# Altium PCB LP_LED_CUBE_8x8x8.PcbDoc (part 2 of 2)
Units mil, origin at the board's own origin, x right, y up, seen from the top; angles counter-clockwise.
Board outline 5225 x 2860 mil, 2 copper layers (Top Layer, Bottom Layer), stack 42.17 mil thick; 161 components, 194 nets, 901 pads, 1 vias.
Unrouted connection lines stored in the file: 1.
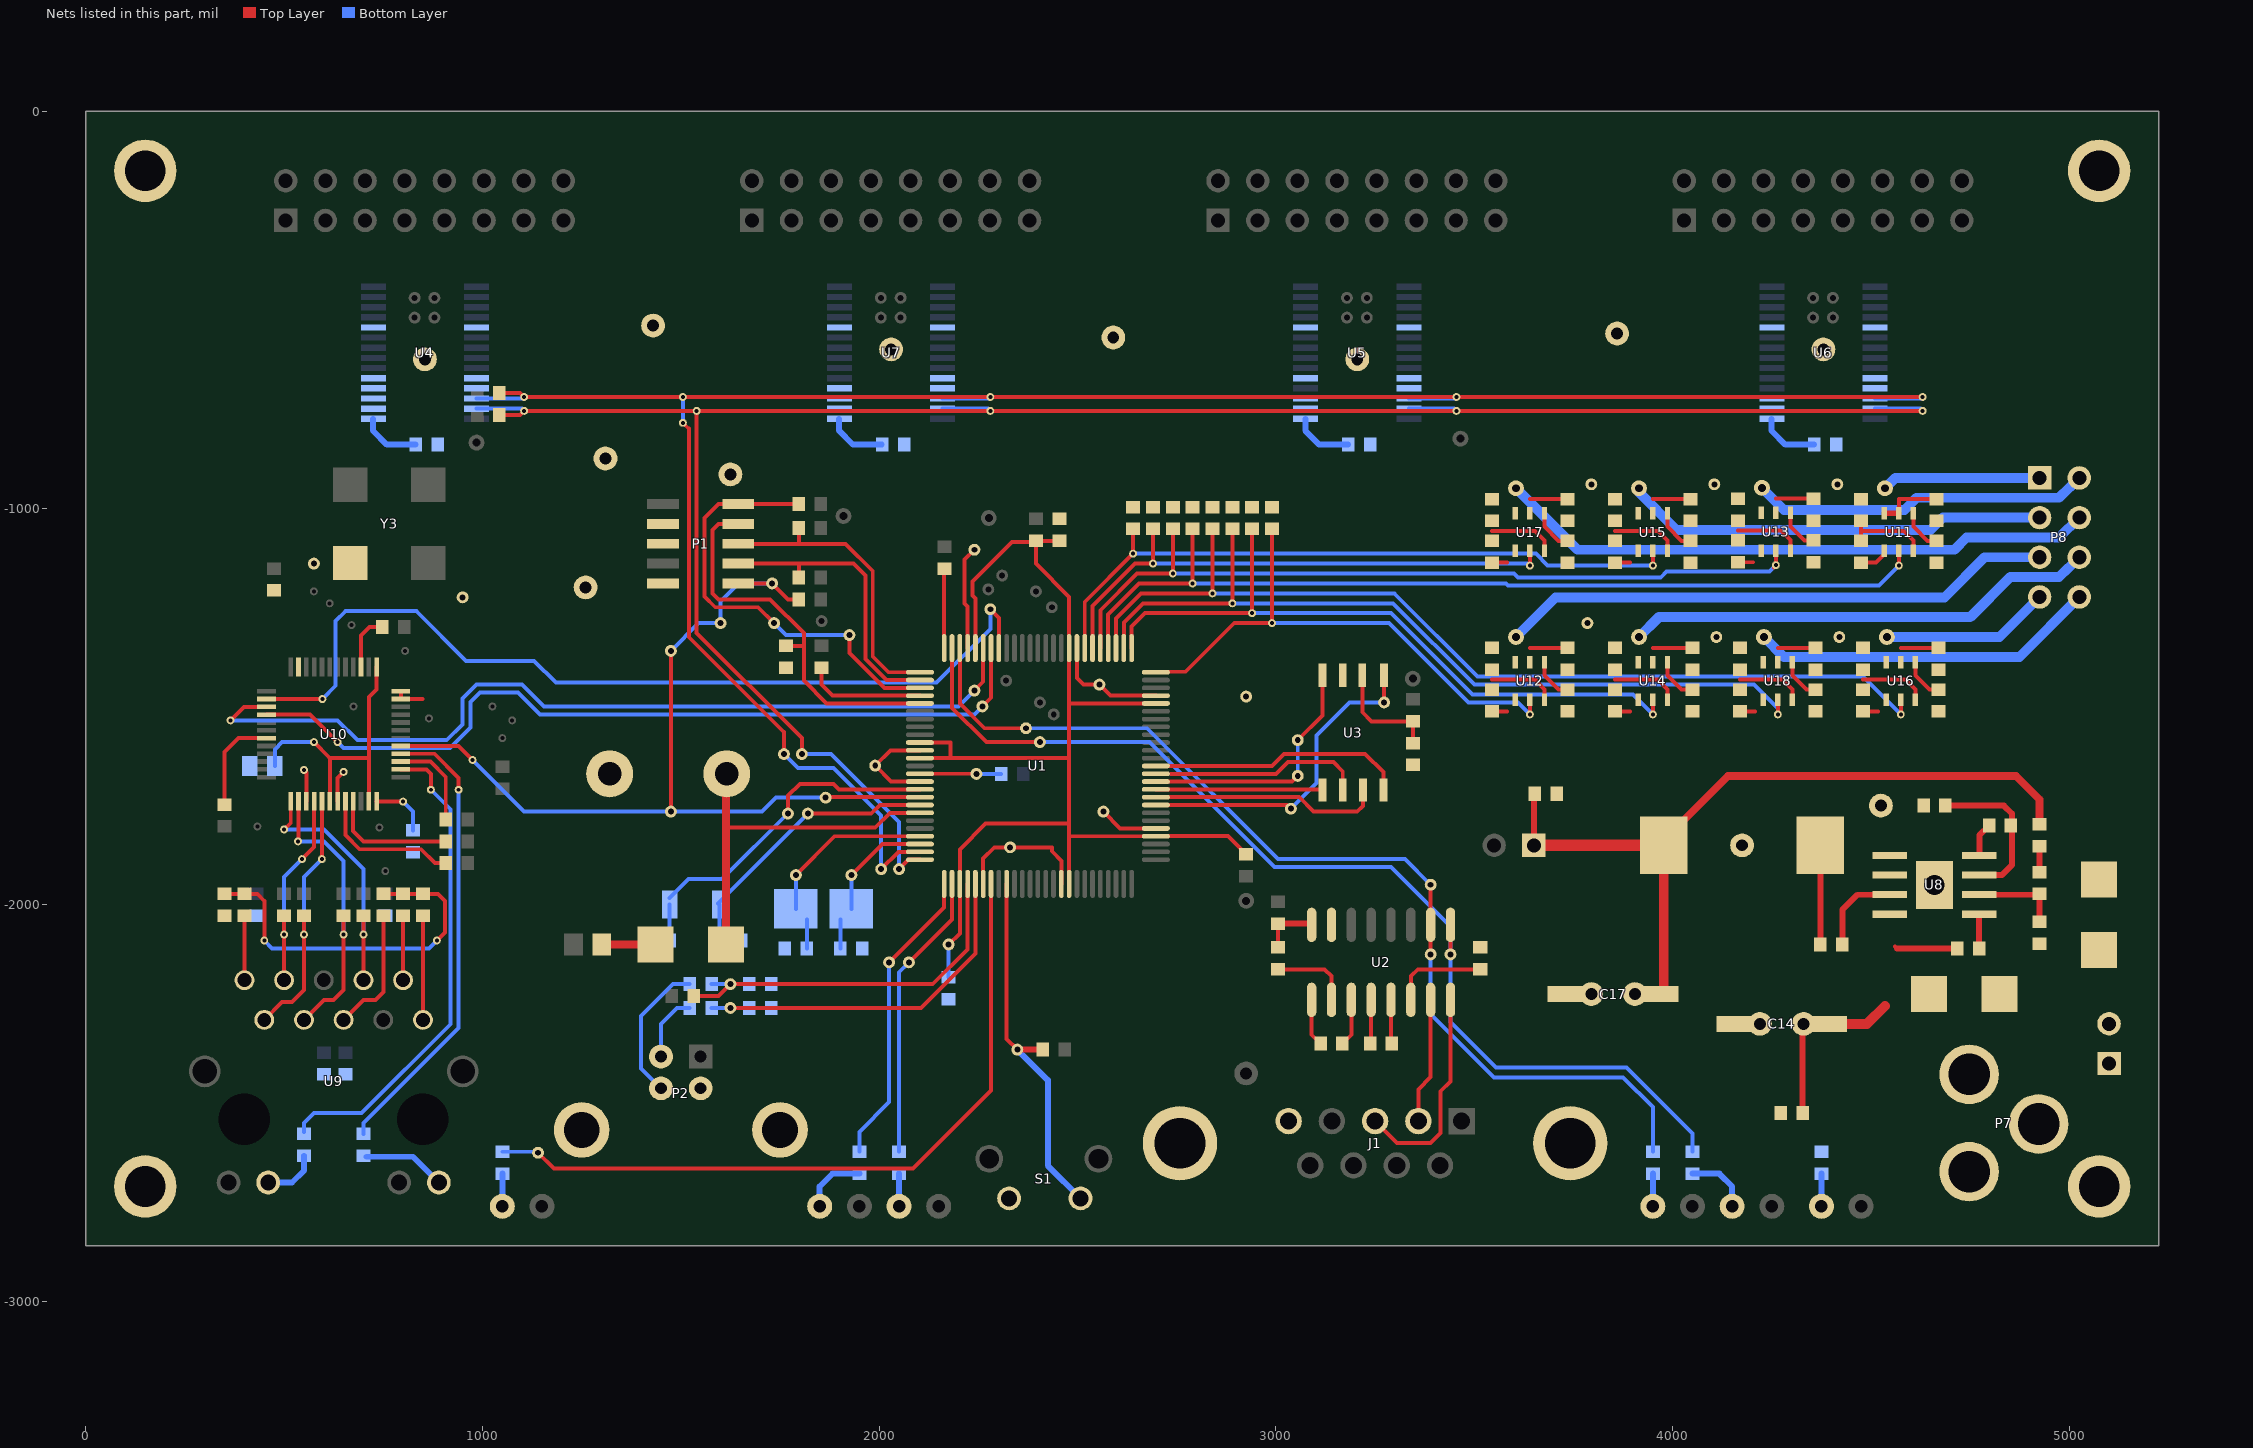
[diagram p2: the nets of this part, all layers, seen from the top]

## Via types
v1: diameter 50, hole 28, Top Layer to Bottom Layer, 1 vias

## Nets (pads, with @x,y where several pads share a name; then routed paths per layer and width w, separated by ;. In a path a pad name is that pad's centre, name@x,y a point inside that pad or via, vN(x,y) a via of type N, cw(c..) or ccw(c..) an arc to the next point about the centre after c; other vN are vias at no path point) (continued)
E-TX-EN: pad.58 pad.61 U1.93 U10.2 | length 2298.6
  Top Layer w10: U10.2@455.71,-1481.42 pad.58@596.42,-1481.42 ; pad.61@2280,-1255 2301.57,-1276.57 U1.93@2301.57,-1352.76
  Bottom Layer w10: pad.58@596.42,-1481.42 630,-1447.83 630,-1285 655,-1260 833.43,-1260 958.43,-1385 1130,-1385 1185,-1440 2145,-1440 2280,-1305 pad.61@2280,-1255
E-TXD0: pad.52 pad.53 U1.95 U10.3 | length 2252.3
  Top Layer w10: pad.52@365,-1535 398.9,-1501.1 U10.3@455.71,-1501.1 ; pad.53@2240,-1460 2262.2,-1437.8 U1.95@2262.2,-1352.76
  Bottom Layer w10: pad.52@365,-1535 635,-1535 685,-1585 910,-1585 950,-1545 950,-1480 985,-1445 1100,-1445 1155,-1500 2200,-1500 pad.53@2240,-1460
E-TXD1: pad.50 pad.51 U1.94 U10.4 | length 2122.6
  Top Layer w10: U10.4@455.71,-1520.79 565.79,-1520.79 pad.51@635,-1590 ; pad.50@2260,-1500 2281.89,-1478.11 U1.94@2281.89,-1352.76
  Bottom Layer w10: pad.51@635,-1590 650,-1605 918.28,-1605 970,-1553.28 970,-1488.28 993.28,-1465 1090,-1465 1145,-1520 2240,-1520 pad.50@2260,-1500
F-CS: U1.63 U3.4 | length 649.8
  Top Layer w10: U1.63@2697.24,-1650 2990,-1650 3020,-1620 3225,-1620 3270.79,-1665.79 U3.4@3270.79,-1710.67
F-RES: U1.59 U3.3 | length 583.2
  Top Layer w10: U1.59@2697.24,-1728.74 3058.74,-1728.74 3095,-1765 3205,-1765 3219.61,-1750.39 U3.3@3219.61,-1710.67
F-SCK: U1.62 U3.2 | length 502.8
  Top Layer w10: 2735,-1670 3000,-1670 3030,-1640 3145,-1640 3168.43,-1663.43 U3.2@3168.43,-1710.67
F-SI: U1.60 U3.1 | length 420
  Top Layer w10: U1.60@2697.24,-1709.06 U3.1@3117.24,-1709.06
F-SO: pad.79 pad.80 U1.61 U3.8 | length 643.2
  Top Layer w10: U1.61@2697.24,-1689.37 3040.63,-1689.37 pad.79@3055,-1675 ; pad.80@3055,-1585 3117.24,-1522.76 U3.8@3117.24,-1421.3
  Bottom Layer w10: pad.79@3055,-1675 pad.80@3055,-1585
F-WP: pad.5@3272.76,-1490 pad.82 U1.58 U3.5 | length 829.3
  Top Layer w10: U1.58@2697.24,-1748.43 3028.43,-1748.43 pad.82@3037.76,-1757.76 ; pad.5@3272.76,-1490 U3.5@3272.76,-1421.3
  Bottom Layer w10: pad.82@3037.76,-1757.76 3102.76,-1692.76 3102.76,-1572.76 3185.51,-1490 pad.5@3272.76,-1490
GND: BT1.2 C4.1 C5.1 C6.1 C7.1 C8.1 C9.2 C10.1 C11.1 C12.2 C13.2 C14.2 C15.2 C17.2 C18.2 C19.2 C20.1 C21.1 C22.1 C23.1 C24.1 C25.2 C26.2 C27.2 C29.2 C31.2 C33.2 C35.2 C37.2 C39.2 C41.2 J1.5 J1.10 J1.11 P1.3 P1.5 P1.9 P2.4 P2.5 P7.2 P7.3 pad. pad.0@575,-1140 pad.1@950,-1225 pad.2@550,-1660 pad.5@2925,-1475 pad.6 pad.7 pad.10@2240,-1105 pad.11@2030,-600 pad.11@3205,-625 pad.11@4380,-600 pad.12@855,-625 pad.16@4660,-1950 pad.19@3785,-1290 pad.19@3795,-940 pad.19@4105,-940 pad.19@4110,-1325 pad.19@4415,-940 pad.19@4420,-1325 pad.23@4175,-1850 pad.23@4525,-1750 pad.27@2330,-1855 pad.28@1310,-875 pad.29@1625,-915 pad.30 pad.31@2590,-570 pad.32@1430,-540 pad.33@3860,-560 pad.41 R7.2 R21.2 R22.1 R23.1 R24.2 R28.1 R30.1 R47.2 R50.2 R51.2 R52.1 R53.1 R56.2 R57.2 R58.1 R59.1 R62.2 R63.2 R64.1 R65.1 R68.2 R69.2 R70.1 R71.1 S1.1 U1.11 U1.15 U1.31 U1.41 U1.55 U1.72 U1.83 U1.97 U2.15 U3.7 U4.2 U4.3 U4.4 U4.5 U4.10 U4.19 U4.24 U4.25 U5.2 U5.3 U5.5 U5.10 U5.19 U5.24 U5.25 U6.2 U6.3 U6.10 U6.19 U6.24 U6.25 U7.2 U7.3 U7.4 U7.10 U7.19 U7.24 U7.25 U8.5 U10.15 U10.19 U10.35 U10.36 U10.47 Y3.2 | length 1549.5
  Top Layer w10: pad.2@550,-1660 556.1,-1666.1 U10.15@556.1,-1739.29 ; U10.19@634.84,-1739.29 634.84,-1680.16 pad.30@650,-1665 ; U10.35@794.29,-1481.42 U10.36@794.29,-1461.73 ; U10.35@794.29,-1481.32 848.58,-1481.42 ; U1.15@2102.76,-1689.37 2030.29,-1689.37 pad.7@1990,-1649.08 2028.45,-1610.63 U1.11@2102.76,-1610.63 ; U1.97@2222.83,-1352.76 2222.83,-1247.83 2215,-1240 2215,-1130 pad.10@2240,-1105 ; U1.31@2262.2,-1947.24 2262.2,-1882.8 2290,-1855 pad.27@2330,-1855 2435,-1855 2435,-1865 2459.06,-1889.06 U1.41@2459.06,-1947.24 ; U1.83@2498.43,-1352.76 2498.43,-1428.43 2515,-1445 pad.41@2555,-1445 2582.83,-1472.83 U1.72@2697.24,-1472.83 ; pad.6@2565,-1765 2607.48,-1807.48 U1.55@2697.24,-1807.48
LED1: pad.29@2075,-2145 R13.1 U1.27 | length 730.5
  Top Layer w10: pad.29@2075,-2145 2183.46,-2036.54 U1.27@2183.46,-1947.24
  Bottom Layer w10: R13.1@2050,-2622.44 2050,-2170 pad.29@2075,-2145
LED2: pad.28@2025,-2145 R14.1 U1.26 | length 763.7
  Top Layer w10: pad.28@2025,-2145 2163.78,-2006.22 U1.26@2163.78,-1947.24
  Bottom Layer w10: R14.1@1950,-2622.44 1950,-2572.44 2025,-2497.44 pad.28@2025,-2145
LED_ACT: pad.25@870,-1710 R37.2 U10.26 | length 1227.1
  Top Layer w10: U10.26@794.29,-1658.58 858.58,-1658.58 870,-1670 pad.25@870,-1710
  Bottom Layer w10: R37.2@550,-2572.44 550,-2550 575,-2525 695,-2525 920,-2300 920,-1760 pad.25@870,-1710
LED_LINK: pad.26@940,-1710 R38.2 U10.28 | length 1167.7
  Top Layer w10: U10.28@794.29,-1619.21 879.21,-1619.21 940,-1680 pad.26@940,-1710
  Bottom Layer w10: R38.2@700,-2577.44 700,-2550 940,-2310 pad.26@940,-1710
"M232 +V": C2.1 U2.2 | length 201.7
  Top Layer w10: C2.1@3005,-2162.56 3122.56,-2162.56 3140,-2180 U2.2@3140,-2239.49
"M232 RX2": J1.3 U2.8 | length 544
  Top Layer w10: J1.3@3250,-2545.08 3304.92,-2600 3390,-2600 3415,-2575 3415,-2470 3440,-2445 U2.8@3440,-2239.49
"M232 TX2": J1.2 U2.7 | length 318.4
  Top Layer w10: J1.2@3359.06,-2545.08 3359.06,-2465 3390,-2434.06 U2.7@3390,-2239.49
NetBT1_1: BT1.1 D6.2 U1.19 | length 934.5
  Top Layer w10: 1613.58,-1805 1990,-1805 2026.89,-1768.11 U1.19@2102.76,-1768.11
  Top Layer w20: D6.2@1613.58,-2100 1613.58,-1805 BT1.1@1613.58,-1670
NetC1_1: C1.1 U2.3 | length 119.8
  Top Layer w10: C1.1@3167.56,-2350 3190,-2327.56 U2.3@3190,-2239.49
NetC1_2: C1.2 U2.1 | length 119.8
  Top Layer w10: U2.1@3090,-2239.49 3090,-2327.56 C1.2@3112.44,-2350
NetC2_2: C2.2 L1.1 U2.16 | length 144.9
  Top Layer w10: C2.2@3005,-2107.44 L1.1@3005,-2047.56
  Top Layer w15: L1.1@3005,-2047.56 U2.16@3090,-2047.56
NetC3_1: C3.1 U2.5 | length 108
  Top Layer w10: C3.1@3290,-2347.44 U2.5@3290,-2239.49
NetC3_2: C3.2 U2.4 | length 108
  Top Layer w10: C3.2@3240,-2347.44 U2.4@3240,-2239.49
NetC4_2: C4.2 U2.6 | length 241.7
  Top Layer w10: U2.6@3340,-2239.49 3340,-2180 3357.44,-2162.56 C4.2@3515,-2162.56
NetC5_2: C5.2 pad.88 U1.16 Y1.1 | length 872.5
  Top Layer w10: pad.88@1770,-1770 1770,-1725 1800,-1695 1885,-1695 1899.06,-1709.05 U1.16@2102.76,-1709.06
  Bottom Layer w10: Y1.1@1471.46,-1982.44 1518.9,-1935 1603.9,-1935 pad.88@1769.45,-1769.45 ; C5.2@1472.01,-2089.45 Y1.1@1472.01,-1999.21
NetC6_2: C6.2 pad.89 U1.18 Y1.2 | length 702.9
  Top Layer w10: pad.89@1820,-1770 1980,-1770 2001.57,-1748.43 U1.18@2102.76,-1748.43
  Bottom Layer w10: Y1.2@1593.6,-1996.4 pad.89@1820.55,-1769.45 ; C6.2@1597.99,-2089.45 Y1.2@1597.99,-1999.21
NetC7_2: C7.2 pad.84@1790,-1925 U1.22 Y2.1 | length 510.7
  Top Layer w10: pad.84@1790,-1925 1887.83,-1827.17 U1.22@2102.76,-1827.17
  Bottom Layer w10: Y2.1@1790,-2010 pad.84@1790,-1925 ; C7.2@1817.56,-2110 Y2.1@1817.56,-2037.56
NetC8_2: C8.2 pad.84@1930,-1925 U1.23 Y2.2 | length 362.6
  Top Layer w10: pad.84@1930,-1925 2008.15,-1846.85 U1.23@2102.76,-1846.85
  Bottom Layer w10: C8.2@1902.44,-2110 Y2.2@1902.44,-2037.56 ; Y2.2@1930,-2010 pad.84@1930,-1925
NetC9_1: C9.1 C10.2 L2.2 L3.2 pad.73 U1.10 U1.12 U1.28 U1.42 U1.54 U1.71 U1.84 U1.96 | length 3146.5
  Top Layer w10: U1.12@2102.76,-1630.32 2180,-1630.32 ; U1.10@2102.76,-1590.94 2180,-1590.94 2180,-1630.32 ; pad.73@2175,-2100 2203.15,-2071.85 2203.15,-1860.22 2268.37,-1795 2478.74,-1795 ; U1.96@2242.52,-1352.76 2242.52,-1227.52 2235,-1220 2235,-1185 2335,-1085 L3.2@2395,-1085 ; L3.2@2395,-1082.56 C10.2@2455,-1082.56 ; L3.2@2395,-1080 L3.2@2395,-1085 ; 2478.43,-1630.32 2180,-1630.32 ; U1.42@2478.74,-1947.24 2478.74,-1492.52 ; 2478.74,-1827.17 U1.54@2697.24,-1827.17 ; U1.54@2697.24,-1826.56 2879.72,-1826.56 L2.2@2925,-1871.83 ; U1.71@2697.24,-1492.52 2478.74,-1492.52 ; L3.2@2395,-1085 2395,-1140 2478.74,-1223.74 U1.84@2478.74,-1352.76 2478.74,-1492.52
  Bottom Layer w10: C9.1@2175,-2182.44 pad.73@2175,-2100
NetC11_2: C11.2 L4.1 U3.6 | length 269.9
  Top Layer w10: U3.6@3217.64,-1421.3 3217.64,-1514.27 3240.93,-1537.56 L4.1@3345,-1537.56 C11.2@3345,-1577.44
NetC16_1: C16.1 U8.7 | length 222.5
  Top Layer w15: C16.1@4427.56,-2100 4427.56,-2012.44 4465.39,-1974.61 U8.7@4546.81,-1974.61
NetC16_2: C16.2 L5.1 U8.6 | length 249.9
  Top Layer w15: C16.2@4372.44,-2100 L5.1@4372.44,-1850.06
NetC19_1: C19.1 R29.2 U8.3 | length 398.1
  Top Layer w15: C19.1@4687.56,-1750 4835,-1750 4855,-1770 4855,-1900 4829.61,-1925.39 U8.3@4773.19,-1925.39
NetC25_1: C25.1 pad.27@885,-2090 pad.28@450,-2090 R31.2 R36.2 R39.1 R40.1 | length 929.4
  Top Layer w10: C25.1@350,-1972.44 R40.1@400,-1972.44 432.44,-1972.44 450,-1990 pad.28@450,-2090 ; R36.2@750,-1972.44 R31.2@800,-1972.44 R39.1@850,-1972.44 887.44,-1972.44 905,-1990 905,-2070 pad.27@885,-2090
  Bottom Layer w10: pad.28@450,-2090 470,-2110 865,-2110 pad.27@885,-2090
NetC28_2: C28.2 R48.1 U11.6 | length 218
  Top Layer w10: R48.1@4475,-1082.44 4475,-1057.5 ; C28.2@4475,-1032.56 4475,-1057.5 ; U11.6@4607,-1108 4607,-1082 4582.5,-1057.5 4475,-1057.5
NetC30_2: C30.2 R49.1 U12.6 | length 168.1
  Top Layer w10: 3545,-1432.5 3652.5,-1432.5 3677,-1457 U12.6@3677,-1483
NetC32_2: C32.2 R54.1 U13.6 | length 168.1
  Top Layer w10: 4165,-1056.5 4272.5,-1056.5 4297,-1081 U13.6@4297,-1107
NetC34_2: C34.2 R55.1 U14.6 | length 168.1
  Top Layer w10: 3855,-1432.5 3962.5,-1432.5 3987,-1457 U14.6@3987,-1483
NetC36_2: C36.2 R60.1 U15.6 | length 168.1
  Top Layer w10: 3855,-1057.5 3962.5,-1057.5 3987,-1082 U15.6@3987,-1108
NetC38_2: C38.2 R61.1 U16.6 | length 168.1
  Top Layer w10: 4480,-1432.5 4587.5,-1432.5 4612,-1457 U16.6@4612,-1483
NetC40_2: C40.2 R66.1 U17.6 | length 168.1
  Top Layer w10: 3545,-1057.5 3652.5,-1057.5 3677,-1082 U17.6@3677,-1108
NetC42_2: C42.2 R67.1 U18.6 | length 168.1
  Top Layer w10: 4170,-1432.5 4277.5,-1432.5 4302,-1457 U18.6@4302,-1483
NetD1_2: D1.2 R12.2 | length 82.4
  Bottom Layer w15: D1.2@1050,-2760 R12.2@1050,-2677.56
NetD2_2: D2.2 R13.2 | length 82.4
  Bottom Layer w15: D2.2@2050,-2760 R13.2@2050,-2677.56
NetD3_2: D3.2 R14.2 | length 163.4
  Bottom Layer w15: D3.2@1850,-2760 1850,-2710 1882.44,-2677.56 R14.2@1950,-2677.56
NetD4_2: D4.2 R15.2 | length 82.4
  Bottom Layer w15: D4.2@3950,-2760 R15.2@3950,-2677.56
NetD5_2: D5.2 R16.2 | length 163.4
  Bottom Layer w15: R16.2@4050,-2677.56 4117.56,-2677.56 4150,-2710 D5.2@4150,-2760
NetD6_1: D6.1 R17.1 | length 136
  Top Layer w20: R17.1@1300.87,-2100 D6.1@1436.85,-2100
NetD7_1: D7.1 D8.1 W1.2
NetD9_2: D9.2 R30.2 | length 82.4
  Bottom Layer w15: D9.2@4375,-2760 R30.2@4375,-2677.56
NetP2_2: P2.2 R20.2 | length 171.5
  Bottom Layer w10: P2.2@1450,-2382.5 1450,-2300 1490,-2260 R20.2@1522.44,-2260
NetP2_3: P2.3 R19.2 | length 358.8
  Bottom Layer w10: P2.3@1450,-2462.5 1400,-2412.5 1400,-2280 1480,-2200 R19.2@1522.44,-2200
NetP7_1: P7.1 W1.1
NetR11_2: pad.70 R11.2 S1.2 U1.34 | length 934.2
  Top Layer w10: U1.34@2321.26,-1947.24 2321.26,-2338.13 pad.70@2348.13,-2365
  Top Layer w15: pad.70@2348.13,-2365 R11.2@2412.44,-2365
  Bottom Layer w15: pad.70@2348.13,-2365 2425,-2441.87 2425,-2657.5 S1.2@2507.5,-2740
NetR21_1: R21.1 U4.1 | length 151.9
  Bottom Layer w15: U4.1@724,-775 724,-805 759,-840 R21.1@831.44,-840
NetR22_2: R22.2 U5.1 | length 151.9
  Bottom Layer w15: U5.1@3074,-775 3074,-805 3109,-840 R22.2@3181.44,-840
NetR23_2: R23.2 U6.1 | length 151.9
  Bottom Layer w15: U6.1@4249,-775 4249,-805 4284,-840 R23.2@4356.44,-840
NetR24_1: R24.1 U7.1 | length 151.9
  Bottom Layer w15: U7.1@1899,-775 1899,-805 1934,-840 R24.1@2006.44,-840
NetR25_1: R25.1 U8.1 | length 86.4
  Top Layer w10: U8.1@4772.56,-2024.45 U8.1@4773.19,-2023.82
  Top Layer w15: R25.1@4772.56,-2110 U8.1@4772.56,-2024.45
NetR26_1: R26.1 R27.2 | length 64.9
  Top Layer w15: R27.2@4925,-1917.44 R26.1@4925,-1852.56
NetR27_1: R27.1 R28.2 U8.2 | length 222.5
  Top Layer w10: R27.1@4922.95,-1974.61 R27.1@4925,-1972.56
  Top Layer w15: U8.2@4773.19,-1974.61 R27.1@4922.95,-1974.61 ; R28.2@4925,-2042.44 R27.1@4925,-1972.56
NetR29_1: R29.1 U8.4 | length 86.2
  Top Layer w15: U8.4@4773.19,-1876.18 4773.19,-1824.25 R29.1@4797.44,-1800
NetR31_1: R31.1 U9.8 | length 162.4
  Top Layer w10: U9.8@800,-2190 R31.1@800,-2027.56
NetR36_1: R36.1 U9.5 | length 321.4
  Top Layer w10: U9.5@650,-2290 700,-2240 730,-2240 750,-2220 R36.1@750,-2027.56
NetR37_1: R37.1 U9.12 | length 139.9
  Bottom Layer w15: U9.12@460,-2700 520,-2700 550,-2670 R37.1@550,-2632.56
NetR38_1: R38.1 U9.14 | length 209.5
  Bottom Layer w15: R38.1@707.44,-2635 825,-2635 U9.14@890,-2700
NetR39_2: R39.2 U9.10 | length 262.4
  Top Layer w10: U9.10@850,-2290 R39.2@850,-2027.56
NetR40_2: R40.2 U9.9 | length 162.4
  Top Layer w10: U9.9@400,-2190 R40.2@400,-2027.56
NetR41_1: R41.1 U10.7 | length 252.5
  Top Layer w10: R41.1@350.16,-1747.28 350.16,-1614.84 385.16,-1579.84 U10.7@455.71,-1579.84
NetR42_2: R42.2 U10.39 | length 141.9
  Top Layer w10: U10.39@693.9,-1400.71 693.9,-1321.1 715,-1300 R42.2@747.44,-1300
NetR43_2: R43.2 U10.21 | length 318.8
  Top Layer w10: U10.21@674.21,-1739.29 674.21,-1814.21 700,-1840 R43.2@907.44,-1840
NetR44_1: R44.1 U10.20 | length 367.3
  Top Layer w10: U10.20@654.53,-1739.29 654.53,-1824.53 690,-1860 845,-1860 880,-1895 R44.1@907.44,-1895
NetR46_2: R46.2 U10.27 | length 236.7
  Top Layer w10: U10.27@794.29,-1638.9 868.9,-1638.9 907.44,-1677.44 R46.2@907.44,-1785
NetR47_1: pad.29@800,-1740 R47.1 U10.24 | length 148.8
  Top Layer w10: U10.24@733.27,-1739.29 pad.29@799.29,-1739.29
  Bottom Layer w10: pad.29@800,-1740 825,-1765 R47.1@825,-1812.44
NetR50_1: R50.1 U11.1 | length 106.7
  Top Layer w10: U11.1@4607,-1013 4607,-1047 4642.44,-1082.44 R50.1@4665,-1082.44
NetR51_1: R51.1 U12.1 | length 106.7
  Top Layer w10: U12.1@3677,-1388 3677,-1422 3712.44,-1457.44 R51.1@3735,-1457.44
NetR56_1: R56.1 U13.1 | length 106.7
  Top Layer w10: U13.1@4297,-1012 4297,-1046 4332.44,-1081.44 R56.1@4355,-1081.44
NetR57_1: R57.1 U14.1 | length 106.7
  Top Layer w10: U14.1@3987,-1388 3987,-1422 4022.44,-1457.44 R57.1@4045,-1457.44
NetR62_1: R62.1 U15.1 | length 106.7
  Top Layer w10: U15.1@3987,-1013 3987,-1047 4022.44,-1082.44 R62.1@4045,-1082.44
NetR63_1: R63.1 U16.1 | length 106.7
  Top Layer w10: U16.1@4612,-1388 4612,-1422 4647.44,-1457.44 R63.1@4670,-1457.44
NetR68_1: R68.1 U17.1 | length 106.7
  Top Layer w10: U17.1@3677,-1013 3677,-1047 3712.44,-1082.44 R68.1@3735,-1082.44
NetR69_1: R69.1 U18.1 | length 106.7
  Top Layer w10: U18.1@4302,-1388 4302,-1422 4337.44,-1457.44 R69.1@4360,-1457.44
PFB: C26.1 pad.16@575,-1590 U10.18 U10.23 U10.37 | length 996.1
  Top Layer w10: pad.16@575,-1590 615,-1630 713.58,-1630 ; U10.18@615.16,-1739.29 615.16,-1630.16 ; U10.23@713.58,-1739.29 713.58,-1630 ; 713.58,-1630 713.58,-1476.42 ; 713.58,-1630 713.58,-1476.42 ; 713.58,-1476.42 733.27,-1456.73 ; 713.58,-1476.42 733.27,-1456.73 ; 733.27,-1456.73 U10.37@733.27,-1400.71 733.27,-1456.73
  Bottom Layer w10: C26.1@476.5,-1650 476.5,-1608.5 495,-1590 pad.16@575,-1590
RESET: P1.10 pad.8@1600,-1290 pad.17@1475,-1765 pad.18@1475,-1360 pad.33@975,-1635 pad.91 pad.92 R1.1 U1.17 U10.29 | length 2490.9
  Top Layer w10: U10.29@794.29,-1599.53 939.53,-1599.53 pad.33@975,-1635 ; pad.17@1475,-1765 pad.18@1475,-1360 ; pad.92@1866.23,-1728.74 U1.17@2102.76,-1728.74 ; pad.91@1730,-1190 P1.10@1645,-1190 pad.91@1730,-1190 ; pad.91@1730,-1190 1770,-1230 ; pad.91@1730,-1190 1770,-1230 ; 1770,-1230 R1.1@1797.44,-1230 1770,-1230
  Bottom Layer w10: pad.33@975,-1635 1105,-1765 pad.17@1475,-1765 1705,-1765 1740.03,-1729.97 pad.92@1865,-1729.97 ; pad.18@1475,-1360 1545,-1290 pad.8@1600,-1290 1600,-1235 1645,-1190 pad.91@1730,-1190
ROW1: pad.13@4570,-1145 pad.22@2790,-1190 R52.2 U1.79 U11.5 | length 2307.2
  Top Layer w10: U1.79@2577.17,-1352.76 2577.17,-1267.83 2655,-1190 pad.22@2790,-1190 R52.2@2790,-1052.56 ; pad.13@4570,-1145 U11.5@4570,-1108
  Bottom Layer w10: pad.22@2790,-1190 3580,-1190 3585,-1195 4520,-1195 pad.13@4570,-1145
ROW2: pad.13@4260,-1144 pad.22@2740,-1165 R58.2 U1.80 U13.5 | length 2010.6
  Top Layer w10: U1.80@2557.48,-1352.76 2557.48,-1257.52 2650,-1165 pad.22@2740,-1165 R58.2@2740,-1052.56 ; pad.13@4255,-1150 4260,-1145 pad.13@4260,-1144 U13.5@4260,-1107
  Bottom Layer w10: pad.22@2740,-1165 3600,-1165 3610,-1175 3970,-1175 3985,-1160 4244,-1160 pad.13@4260,-1144
ROW3: pad.13@3950,-1145 pad.22@2640,-1115 R64.2 U1.82 U15.5 | length 1710.1
  Top Layer w10: U1.82@2518.11,-1352.76 2518.11,-1236.89 pad.22@2640,-1115 R64.2@2640,-1052.56 ; pad.13@3950,-1145 U15.5@3950,-1108
  Bottom Layer w10: pad.22@2640,-1115 3655,-1115 3685,-1145 pad.13@3950,-1145
ROW4: pad.13@3640,-1145 pad.22@2690,-1140 R70.2 U1.81 U17.5 | length 1378.7
  Top Layer w10: U1.81@2537.8,-1352.76 2537.8,-1247.2 2645,-1140 pad.22@2690,-1140 R70.2@2690,-1052.56 ; pad.13@3640,-1145 U17.5@3640,-1108
  Bottom Layer w10: pad.22@2690,-1140 3635,-1140 pad.13@3640,-1145
ROW5: pad.13@3640,-1520 pad.22@2990,-1290 R53.2 U1.75 U12.5 | length 1363.2
  Top Layer w10: U1.75@2697.24,-1412.56 2772.44,-1412.56 2895,-1290 pad.22@2990,-1290 R53.2@2990,-1052.56 ; pad.13@3640,-1520 U12.5@3640,-1483
  Bottom Layer w10: pad.22@2990,-1290 3285,-1290 3485,-1490 3610,-1490 pad.13@3640,-1520
ROW6: pad.13@3950,-1520 pad.22@2940,-1265 R59.2 U1.76 U14.5 | length 1736.8
  Top Layer w10: U1.76@2636.22,-1352.76 2636.22,-1298.78 2670,-1265 pad.22@2940,-1265 R59.2@2940,-1052.56 ; pad.13@3950,-1520 U14.5@3950,-1483
  Bottom Layer w10: pad.22@2940,-1265 3290,-1265 3495,-1470 3900,-1470 pad.13@3950,-1520
ROW7: pad.13@4575,-1520 pad.22@2840,-1215 R65.2 U1.78 U16.5 | length 2404.7
  Top Layer w10: U1.78@2596.85,-1352.76 2596.85,-1278.15 2660,-1215 pad.22@2840,-1215 R65.2@2840,-1052.56 ; pad.13@4575,-1520 U16.5@4575,-1483
  Bottom Layer w10: pad.22@2840,-1215 3298.28,-1215 3508.28,-1425 4480,-1425 pad.13@4575,-1520
ROW8: pad.13@4265,-1520 pad.22@2890,-1240 R71.2 U1.77 U18.5 | length 2082
  Top Layer w10: U1.77@2616.54,-1352.76 2616.54,-1288.46 2665,-1240 pad.22@2890,-1240 R71.2@2890,-1052.56 ; pad.13@4265,-1520 U18.5@4265,-1483
  Bottom Layer w10: pad.22@2890,-1240 3295,-1240 3500,-1445 4205,-1445 4265,-1505 pad.13@4265,-1520
ROWH1: C27.1 C28.1 P8.1 pad.4@4535,-950 U11.2 U11.3 | length 575.4
  Top Layer w10: U11.2@4570,-1013 4570,-977.44 C27.1@4665,-977.44
  Top Layer w13: U11.3@4533,-1013 U11.2@4570,-1013
  Bottom Layer w10: pad.4@4535,-950 pad.4@4539,-954 ; P8.1@4924,-925 P8.1@4925,-924
  Bottom Layer w25: pad.4@4535,-950 4561,-924 P8.1@4925,-924
ROWH2: C31.1 C32.1 P8.2 pad.4@4225,-949 U13.2 U13.3 | length 951.5
  Top Layer w10: 4260,-976.44 C31.1@4355,-976.44
  Bottom Layer w25: pad.4@4225,-949 4281,-1005 4584,-1005 4615,-974 4974,-974 P8.2@5025,-924
ROWH3: C35.1 C36.1 P8.3 pad.4@3915,-950 U15.2 U15.3 | length 1167.2
  Top Layer w10: 3950,-977.44 C35.1@4045,-977.44
  Bottom Layer w10: pad.4@3915,-960 pad.4@3915,-950
  Bottom Layer w25: pad.4@3915,-960 4010,-1055 4650,-1055 4681,-1024 P8.3@4925,-1024
ROWH4: C39.1 C40.1 P8.4 pad.4@3605,-950 U17.2 U17.3 | length 1612.5
  Top Layer w10: 3640,-977.44 C39.1@3735,-977.44
  Bottom Layer w25: pad.4@3605,-950 3760,-1105 4710,-1105 4741,-1074 4974,-1074 P8.4@5025,-1024
ROWH5: C29.1 C30.1 P8.5 pad.4@3605,-1325 U12.2 U12.3 | length 1498.3
  Top Layer w10: 3640,-1352.44 C29.1@3735,-1352.44
  Bottom Layer w25: pad.4@3605,-1325 3705,-1225 4685,-1225 4786,-1124 P8.5@4925,-1124
ROWH6: C33.1 C34.1 P8.6 pad.4@3915,-1325 U14.2 U14.3 | length 1289
  Top Layer w10: 3950,-1352.44 C33.1@4045,-1352.44
  Bottom Layer w10: P8.6@5025,-1125 P8.6@5025,-1124
  Bottom Layer w25: pad.4@3915,-1325 3965,-1275 4750,-1275 4851,-1174 4974,-1174 P8.6@5025,-1124
ROWH7: C37.1 C38.1 P8.7 pad.4@4540,-1325 U16.2 U16.3 | length 523.2
  Top Layer w10: 4575,-1352.44 C37.1@4670,-1352.44
  Bottom Layer w10: pad.4@4540,-1325 pad.4@4541,-1324
  Bottom Layer w25: pad.4@4540,-1325 4824,-1325 P8.7@4925,-1224
ROWH8: C41.1 C42.1 P8.8 pad.4@4230,-1325 U18.2 U18.3 | length 973.3
  Top Layer w10: 4265,-1352.44 C41.1@4360,-1352.44
  Bottom Layer w25: pad.4@4230,-1325 4280,-1375 4874,-1375 P8.8@5025,-1224
RSTOUT: pad.86 R2.1 U1.14 | length 204.4
  Top Layer w10: U1.14@2102.76,-1669.68 pad.86@2244.68,-1669.68
  Bottom Layer w10: pad.86@2245,-1670 R2.1@2307.44,-1670
RTCK: R10.1 U1.100 | length 200.2
  Top Layer w10: U1.100@2163.78,-1352.76 R10.1@2163.78,-1152.56
RXD+: pad.21 pad.23@535.07,-1840 R35.1 U9.3 U10.14 | length 738.5
  Top Layer w10: pad.23@536.42,-1838.65 U10.14@536.42,-1739.29 ; U9.3@550,-2290 600,-2240 625,-2240 650,-2215 R35.1@650,-2027.56
  Bottom Layer w10: pad.23@535.07,-1840 600,-1840 650,-1890 pad.21@650,-2075
RXD-: pad.22@700,-2075 pad.24 R34.1 U9.6 U10.13 | length 646.5
  Top Layer w10: pad.24@500,-1810 516.73,-1793.27 U10.13@516.73,-1739.29 ; U9.6@700,-2190 R34.1@700,-2027.56
  Bottom Layer w10: pad.24@500,-1810 600,-1810 700,-1910 pad.22@700,-2075
SCL-0: pad.2@1105,-720 pad.2@2280,-720 pad.2@3455,-720 pad.2@4630,-720 pad.9 pad.10@1505,-720 pad.11@2005,-1910 pad.14 R4.2 U1.24 U4.26 U5.26 U6.26 U7.26 | length 5644.1
  Top Layer w10: R4.2@1042.56,-710 1095,-710 pad.2@1105,-720 pad.10@1505,-720 pad.2@2280,-720 pad.2@3455,-720 pad.2@4630,-720 ; pad.9@1505,-785 1520,-800 1520,-1325 1760,-1565 pad.14@1760,-1620 ; pad.11@2005,-1910 2048.46,-1866.54 U1.24@2102.76,-1866.54
  Bottom Layer w10: U4.26@984.84,-723.82 1101.18,-723.82 pad.2@1105,-720 ; pad.9@1505,-785 pad.10@1505,-720 ; pad.14@1760,-1620 1795,-1655 1885,-1655 2005,-1775 pad.11@2005,-1910 ; U7.26@2159.84,-723.82 2276.18,-723.82 pad.2@2280,-720 ; U5.26@3334.84,-723.82 3451.18,-723.82 pad.2@3455,-720 ; U6.26@4509.84,-723.82 4626.18,-723.82 pad.2@4630,-720
SDA-0: pad.1@1105,-755 pad.1@2280,-755 pad.1@3455,-755 pad.1@4630,-755 pad.8@1540,-755 pad.12@2050,-1910 pad.13@1805,-1620 R3.2 U1.25 U4.27 U5.27 U6.27 U7.27 | length 5553.3
  Top Layer w10: R3.2@1042.56,-765 1095,-765 pad.1@1105,-755 pad.8@1540,-755 ; pad.13@1805,-1620 1805,-1580 1540,-1315 pad.8@1540,-755 ; pad.12@2050,-1910 2073.78,-1886.22 U1.25@2102.76,-1886.22 ; pad.1@4630,-755 pad.1@3455,-755 pad.1@2280,-755 pad.8@1540,-755
  Bottom Layer w10: U4.27@984.84,-749.41 1099.41,-749.41 pad.1@1105,-755 ; pad.13@1805,-1620 1878.28,-1620 2050,-1791.72 pad.12@2050,-1910 ; U7.27@2159.84,-749.41 2274.41,-749.41 pad.1@2280,-755 ; U5.27@3334.84,-749.41 3449.41,-749.41 pad.1@3455,-755 ; U6.27@4509.84,-749.41 4624.41,-749.41 pad.1@4630,-755
TCK: P1.4 R7.1 U1.5 | length 984.2
  Top Layer w10: P1.4@1645,-1040 1595,-1040 1580,-1055 1580,-1215 1595,-1230 1725,-1230 1810,-1315 1810,-1435 1867.52,-1492.52 U1.5@2102.76,-1492.52 ; R7.1@1765,-1347.44 1810,-1347.44
TDI: P1.8 R5.1 U1.2 | length 734.9
  Top Layer w10: P1.8@1645,-1140 1935,-1140 1965,-1170 1965,-1380 2018.46,-1433.46 U1.2@2102.76,-1433.46 ; R5.1@1797.44,-1175 1797.44,-1142.44
TDO/SW0: P1.6 R6.1 U1.1 | length 757.8
  Top Layer w10: P1.6@1645,-1090 1915,-1090 1983.78,-1158.78 1983.78,-1373.78 2023.78,-1413.78 U1.1@2102.76,-1413.78 ; 1797.44,-1090 R6.1@1797.44,-1050
TMS: P1.2 pad.35 pad.36 R8.1 U1.3 | length 1114.6
  Top Layer w10: pad.35@1735,-1290 1695,-1250 1586.72,-1250 1560,-1223.28 1560,-1025 1595,-990 P1.2@1645,-990 R8.1@1797.44,-990 ; pad.36@1925,-1320 1925,-1365 2013.15,-1453.15 U1.3@2102.76,-1453.15
  Bottom Layer w10: pad.35@1735,-1290 1765,-1320 pad.36@1925,-1320
TRST: R9.1 U1.4 | length 301.7
  Top Layer w10: R9.1@1855,-1402.56 1855,-1445 1882.83,-1472.83 U1.4@2102.76,-1472.83
TXD+: pad.17@550,-2075 pad.19@595,-1885 R33.1 U9.1 U10.17 | length 672.4
  Top Layer w10: U9.1@450,-2290 495,-2245 520,-2245 550,-2215 R33.1@550,-2027.56 ; pad.19@595.47,-1884.53 U10.17@595.47,-1739.29
  Bottom Layer w10: pad.17@550,-2075 550,-1930 pad.19@595,-1885
TXD-: pad.18@500,-2075 pad.20 R32.1 U9.2 U10.16 | length 529.5
  Top Layer w10: U9.2@500,-2190 pad.18@500,-2075 R32.1@500,-2027.56 ; pad.20@545,-1885 575.79,-1854.21 U10.16@575.79,-1739.29
  Bottom Layer w10: pad.18@500,-2075 500,-1930 pad.20@545,-1885
U0_RXD: pad.25@3440,-2125 pad.37 R16.1 U1.99 U2.9 | length 2723
  Top Layer w10: U1.99@2183.46,-1352.76 2183.46,-1503.46 2270,-1590 pad.37@2405,-1590 ; pad.25@3440,-2125 U2.9@3440,-2050.51
  Bottom Layer w10: pad.37@2405,-1590 2681.72,-1590 2996.72,-1905 3290.61,-1905 3440,-2054.39 pad.25@3440,-2125 3440,-2295 3555,-2410 3883.28,-2410 4050,-2576.72 R16.1@4050,-2622.44
U0_TXD: pad.25@3390,-2125 pad.38 pad.39 R15.1 U1.98 U2.10 | length 2611
  Top Layer w10: U1.98@2203.15,-1352.76 2203.15,-1493.15 2265,-1555 pad.38@2370,-1555 ; pad.25@3390,-2125 U2.10@3390,-2050.51 ; U2.10@3390,-2049.9 pad.39@3390,-1949.39
  Bottom Layer w10: pad.38@2370,-1555 2675,-1555 3005,-1885 3325.61,-1885 pad.39@3390,-1949.39 ; pad.25@3390,-2125 3390,-2275 3550,-2435 3875,-2435 3950,-2510 R15.1@3950,-2622.44
"USB D+": C12.1 pad.27@1625,-2200 R18.2 R19.1 U1.29 | length 998.9
  Top Layer w10: R18.2@1532.56,-2230 1595,-2230 pad.27@1625,-2200 2135,-2200 2222.83,-2112.17 U1.29@2222.83,-1947.24
  Bottom Layer w10: R19.1@1577.56,-2200 pad.27@1625,-2200 C12.1@1672.44,-2200
"USB D-": C13.1 pad.27@1625,-2260 R20.1 U1.30 | length 944.6
  Top Layer w10: pad.27@1625,-2260 2105,-2260 2242.52,-2122.48 U1.30@2242.52,-1947.24
  Bottom Layer w10: R20.1@1577.56,-2260 pad.27@1625,-2260 C13.1@1672.44,-2260
"USB LED": pad.8@1140,-2625 R12.1 U1.32 | length 1848.3
  Top Layer w10: pad.8@1140,-2625 1180,-2665 2085,-2665 2281.89,-2468.11 U1.32@2281.89,-1947.24
  Bottom Layer w10: R12.1@1050,-2622.44 pad.8@1137.44,-2622.44
VCC: C14.1 C15.1 D8.2 R25.2 U8.8 | length 549.2
  Top Layer w10: C14.1@4327.56,-2302.44 C14.1@4330,-2300 ; 4560,-2105 4565,-2110
  Top Layer w15: C15.1@4327.56,-2525 C14.1@4327.56,-2302.44 ; 4565,-2110 R25.2@4717.44,-2110
  Top Layer w25: C14.1@4390,-2300 4490,-2300 4535,-2255
"VCC LED": D7.2 R48.2 R49.2 R54.2 R55.2 R60.2 R61.2 R66.2 R67.2 U11.4 U12.4 U13.4 U14.4 U15.4 U16.4 U17.4 U18.4 | length 337.6
  Top Layer w10: R49.2@3545,-1512.56 3582.44,-1512.56 ; R66.2@3545,-1137.56 3582.44,-1137.56 ; R55.2@3855,-1512.56 3892.44,-1512.56 ; R60.2@3855,-1137.56 3892.44,-1137.56 ; R54.2@4165,-1136.56 4202.44,-1136.56 ; R67.2@4170,-1512.56 4207.44,-1512.56 ; R48.2@4475,-1137.56 4512.44,-1137.56 4533,-1117 U11.4@4533,-1108 ; R61.2@4480,-1512.56 4517.44,-1512.56
VOUT: C17.1 C18.1 L5.2 R26.2 W2.1 | length 1985.6
  Top Layer w10: C18.1@3650,-1722.44 C18.1@3652.44,-1720
  Top Layer w15: W2.1@3650,-1850 C18.1@3650,-1722.44 ; L5.2@3977.5,-1850 L5.2@3977.5,-1837.5
  Top Layer w20: L5.2@3977.5,-1837.5 4140,-1675 4865,-1675 4925,-1735 R26.2@4925,-1797.44
  Top Layer w25: C17.1@3940,-2225 3977.5,-2225 L5.2@3977.5,-1850
  Top Layer w30: W2.1@3650,-1850 L5.2@3977.5,-1850
pads on no net: J1.1 J1.4 J1.6 J1.7 J1.8 J1.9 P1.7 P2.1 R2.2 S1.GND U1.6 U1.7 U1.8 U1.9 U1.13 U1.20 U1.21 U1.33 U1.35 U1.36 U1.37 U1.38 U1.39 U1.40 U1.43 U1.44 U1.45 U1.46 U1.47 U1.48 U1.49 U1.50 U1.51 U1.52 U1.53 U1.56 U1.57 U1.64 U1.65 U1.66 U1.67 U1.68 U1.69 U1.70 U1.73 U1.74 U1.85 U2.11 U2.12 U2.13 U2.14 U9. U9.GND U10.1 U10.5 U10.6 U10.8 U10.9 U10.10 U10.11 U10.12 U10.25 U10.33 U10.38 U10.42 U10.45 U10.46 Y3.1
copper on no net: | length 1569.3
  Bottom Layer w10: 831.86,-1315 941.86,-1425 1110,-1425 1165,-1480 2165,-1480 2220,-1425 2310,-1425

## Polygon pours and split planes (outlines as drawn)
GND on Bottom Layer "Top Layer-No Net" (solid, remove dead copper, pour order 2): 0,0 5225,0 5225,-2860 0,-2860
GND on Top Layer "Top Layer-No Net" (solid, remove dead copper, pour order 4): 5225,0 5225,-2860 0,-2860 0,0

## Keep-outs
Keep-Out Layer:
  the board outline again, w10

## Other copper
Top Layer:
  rectangle net NetP7_1: 4750,-2450 5135,-2365
  rectangle net NetD7_1: 5015,-2335 5135,-2065
  region net NetC28_2: 4490,-1070 4490,-1045 4460,-1045 4460,-1070
  region net ROWH1: 4580,-1035 4580,-925 4510,-925 4510,-1035
  region net ROWH1: 4510,-995 4510,-925 4455,-925 4455,-995
  region net "VCC LED": 4550,-1175 4550,-1085 4510,-1085 4510,-1175
  region net "VCC LED": 3620,-1550 3620,-1460 3580,-1460 3580,-1550
  region net NetC30_2: 3560,-1445 3560,-1420 3530,-1420 3530,-1445
  region net ROWH5: 3650,-1410 3650,-1300 3580,-1300 3580,-1410
  region net ROWH5: 3580,-1370 3580,-1300 3525,-1300 3525,-1370
  region net ROWH2: 4200,-994 4200,-924 4145,-924 4145,-994
  region net ROWH2: 4270,-1035 4270,-924 4200,-924 4200,-1035
  region net NetC32_2: 4180,-1069 4180,-1044 4150,-1044 4150,-1069
  region net "VCC LED": 4240,-1175 4240,-1085 4200,-1085 4200,-1175
  region net "VCC LED": 3930,-1550 3930,-1460 3890,-1460 3890,-1550
  region net NetC34_2: 3870,-1445 3870,-1420 3840,-1420 3840,-1445
  region net ROWH6: 3960,-1410 3960,-1300 3890,-1300 3890,-1410
  region net ROWH6: 3890,-1370 3890,-1300 3835,-1300 3835,-1370
  region net ROWH3: 3890,-995 3890,-925 3835,-925 3835,-995
  region net ROWH3: 3960,-1035 3960,-925 3890,-925 3890,-1035
  region net NetC36_2: 3870,-1070 3870,-1045 3840,-1045 3840,-1070
  region net "VCC LED": 3930,-1175 3930,-1085 3890,-1085 3890,-1175
  region net ROWH4: 3580,-995 3580,-925 3525,-925 3525,-995
  region net ROWH4: 3650,-1035 3650,-925 3580,-925 3580,-1035
  region net NetC40_2: 3560,-1070 3560,-1045 3530,-1045 3530,-1070
  region net "VCC LED": 3620,-1175 3620,-1085 3580,-1085 3580,-1175
  rectangle net "VCC LED": 3580,-1250 4850,-1170
  region net NetC42_2: 4185,-1445 4185,-1420 4155,-1420 4155,-1445
  region net "VCC LED": 4245,-1550 4245,-1460 4205,-1460 4205,-1550
  region net ROWH8: 4205,-1370 4205,-1300 4150,-1300 4150,-1370
  region net ROWH8: 4275,-1410 4275,-1300 4205,-1300 4205,-1410
  region net ROWH7: 4585,-1410 4585,-1300 4515,-1300 4515,-1410
  region net ROWH7: 4515,-1370 4515,-1300 4460,-1300 4460,-1370
  region net "VCC LED": 4550,-1550 4550,-1460 4515,-1460 4515,-1550
  region net NetC38_2: 4495,-1445 4495,-1420 4465,-1420 4465,-1445
  rectangle net "VCC LED": 3580,-1625 4850,-1545
  rectangle net "VCC LED": 4750,-1555 4850,-1215
  rectangle net "VCC LED": 4835,-1625 5135,-1460
  rectangle net "VCC LED": 5015,-1985 5135,-1575
  rectangle net NetD7_1: 4775,-2285 5025,-2165
  rectangle net VCC: 4500,-2285 4590,-2005
  rectangle net VCC: 4565,-2285 4695,-2165
  rectangle net NetC16_2: 4305,-1945 4595,-1905
  rectangle net NetC16_2: 4305,-1945 4440,-1770
  rectangle: 3425,-1250 3590,-1170
  rectangle net "VCC LED": 3425,-1625 3590,-1545
  rectangle net "VCC LED": 3425,-1625 3510,-1190
  rectangle net GND: 1250,-1740 1390,-1600
  rectangle net GND: 1215,-1245 1305,-1155
  rectangle net GND: 1265,-920 1355,-830
  rectangle net GND: 1580,-960 1670,-870
  rectangle net GND: 1385,-585 1475,-495
  rectangle net GND: 1985,-645 2075,-555
  rectangle net GND: 2545,-615 2635,-525
  rectangle net GND: 3160,-670 3255,-580
  rectangle net GND: 3815,-605 3905,-515
  rectangle net GND: 4335,-645 4425,-555
  rectangle net GND: 4130,-1895 4220,-1805
  rectangle net GND: 4480,-1795 4570,-1705
  rectangle net GND: 4080,-965 4130,-915
  rectangle net GND: 4390,-965 4440,-915
  rectangle net GND: 3770,-965 3820,-915
  rectangle net GND: 3760,-1315 3810,-1265
  rectangle net GND: 4085,-1350 4135,-1300
  rectangle net GND: 4395,-1350 4445,-1300
  rectangle net GND: 810,-670 895,-585
Bottom Layer:
  rectangle net NetP7_1: 4760,-2450 5135,-2365
  rectangle net GND: 1385,-585 1475,-495
  rectangle net GND: 1265,-920 1355,-830
  rectangle net GND: 1580,-960 1670,-870
  rectangle net GND: 1215,-1245 1305,-1155
  rectangle net GND: 2545,-615 2635,-525
  rectangle net GND: 1250,-1750 1395,-1595
  rectangle net GND: 4335,-645 4425,-555
  rectangle net GND: 3815,-605 3905,-515
  rectangle net GND: 3770,-965 3820,-915
  rectangle net GND: 4080,-965 4130,-915
  rectangle net GND: 4390,-965 4440,-915
  rectangle net GND: 4085,-1350 4135,-1300
  rectangle net GND: 3760,-1315 3810,-1265
  rectangle net GND: 4395,-1350 4445,-1300
  rectangle net GND: 4615,-2000 4705,-1900
  rectangle net GND: 4480,-1795 4570,-1710
  rectangle net GND: 4130,-1895 4220,-1805
  rectangle net GND: 3160,-670 3250,-580
  rectangle net GND: 1985,-645 2075,-555
  rectangle net GND: 810,-670 900,-580

## Silkscreen, mask and mechanical layers (free items; w line width, h text height)
Top Overlay:
  lines w10: 0,90 0,110 ; 60,80 0,100 ; 60,120 0,100 ; 2331.59,100 0,100 ; 2893.41,100 5225,100 ; 5165,80 5225,100 ; 5165,120 5225,100 ; 5225,90 5225,110 ; 5305,-2800 5325,-2860 ; 5305,-60 5325,0 ; 5315,-2860 5335,-2860 ; 5315,0 5335,0 ; 5325,-1710.91 5325,-2860 ; 5325,-1149.09 5325,0 ; 5345,-2800 5325,-2860 ; 5345,-60 5325,0
  text "5225 (mil)" at 2341.59,64.01 h60
  text "LPPROJECTS" at 80,-305 h100 r270
  text "Luka Penger" at 165,-305 h100 r270
  text "1-16" at 1305,-465 h60
  text "17-32" at 2450,-465 h60
  text "33-48" at 3619,-465 h60
  text "49-64" at 4795,-465 h60
  text "Ver 3.0.0" at 5160,-505 h60 r90
  text "1-8" at 5150,-695 h60 r90
  text "2860 (mil)" at 5360.99,-1700.91 h60 r90
  text "LED CUBE 8x8x8" at 100,-1825 h100 r270
  text "LPC1769" at 2505,-2175 h60
Bottom Overlay:
  text "COLUMN 1 - 16" at 1035,-90 h60
  text "COLUMN 17 - 32" at 2209,-90 h60
  text "COLUMN 33 - 48" at 3385,-90 h60
  text "COLUMN 49 - 64" at 4560,-90 h60
  text "ROW 1 - 8" at 5150,-970 h60 r90
  text "USB" at 1130,-2575 h60
  text "LED2" at 1985,-2575 h60
  text "LED1" at 2165,-2575 h60
  text "TX" at 4035,-2575 h60
  text "RX" at 4240,-2575 h60
  text "PWR" at 4495,-2575 h60
  text "5V - 17V" at 4850,-2825 h60
  text "UPDATE" at 2525,-2830 h60
  text "ETHERNET" at 770,-2835 h60
  text "USB" at 1565,-2835 h60
  text "SERIAL" at 3350,-2835 h60

## Text inside footprints (layer, text, board x,y; h text height)
BT1: Top Overlay "+" at 1637.44,-1746.77 h40 r180
C14: Top Overlay "+" at 4325,-2215 h40 r270
C17: Top Overlay "+" at 3900,-2140 h40 r270
J1: Top Overlay "1" at 3485,-2600 h40 r180; Top Overlay "5" at 3030,-2600 h40 r180; Top Overlay "9" at 3100,-2710 h40 r180; Top Overlay "6" at 3430,-2710 h40 r180
P2: Top Overlay "1" at 1614.17,-2402.17 h40